# Altium PCB projet_pcb_nucleo_g431.PCBDOC
Units mil, origin at the board's own origin, x right, y up, seen from the top; angles counter-clockwise.
Board outline 4255 x 4455 mil, 2 copper layers (TopLayer, BottomLayer); 23 components, 33 nets, 143 pads, 22 vias.
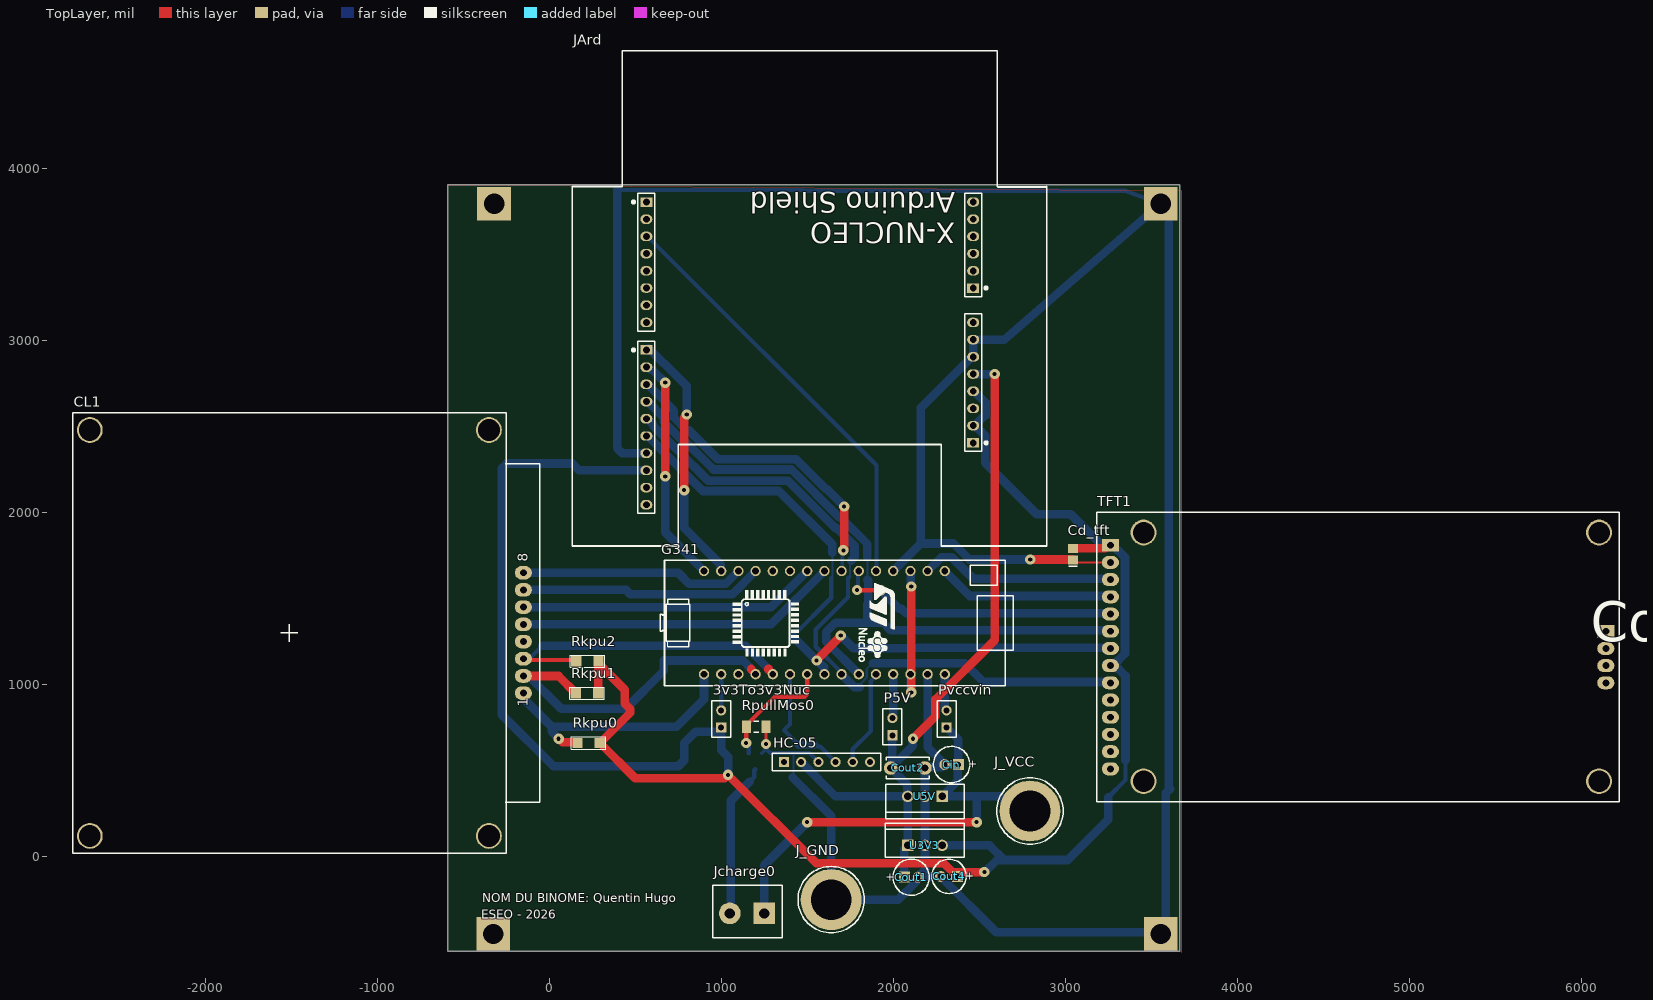
[diagram p0: TopLayer view]
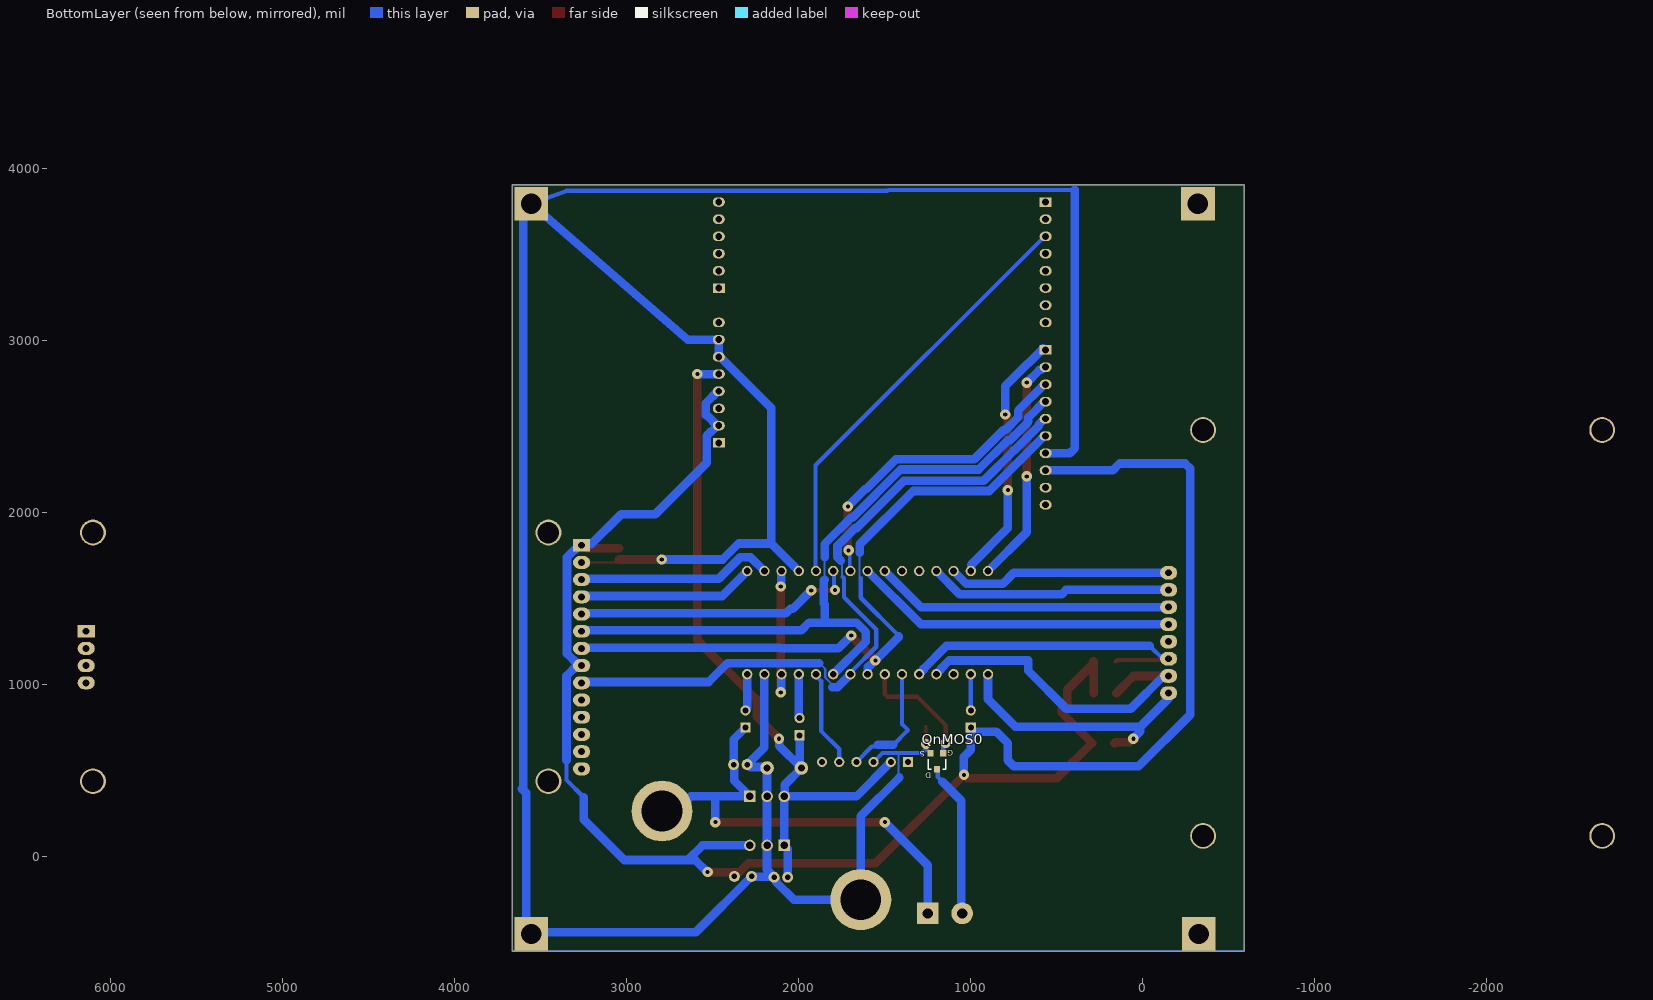
[diagram p1: BottomLayer view, seen from below]

## Layer stack, top to bottom
TopSolder: solder mask 0.4, Solder Resist, Dk 3.5
TopLayer: signal copper 1.4
Dielectric1: core 12.6, FR-4, Dk 4.8
BottomLayer: signal copper 1.4
BottomSolder: solder mask 0.4, Solder Resist, Dk 3.5

## Board outline
-590,-550 -590,3905 3665,3905 3665,-550

## Design rules (kind name [scope] priority, off if disabled: settings)
Clearance PowerPlaneClearance [InNamedPolygon('Bot-GND') Or  InNamedPolygon('Top-GND')] p1: gap=40 ignorepadtopadclearanceinfootprint=FALSE except(0: Arc-Hole Track-Hole SMDPad-Hole THPad-Hole Via-Hole Fill-Hole Poly-Hole Region-Hole Text-Hole)
Clearance [All] p2: gap=10 ignorepadtopadclearanceinfootprint=TRUE
FabricationTestPointUsage TestPointUsage [All] p1: valid=0 allowmultiple=FALSE
FabricationTestpoint Testpoint [All] p1: side=3 testpointundercomponent=TRUE minsize=40 maxsize=100 preferedsize=60 minholesize=20 maxholesize=40 preferedholesize=32 testpointgrid=1 allowsidetop=TRUE allowsidebottom=TRUE usegrid=TRUE gridtolerance=0.01
Height [All] p1: minheight=0 maxheight=2000 prefheight=500
HoleSize [All] p1: absolutevalues=TRUE maxlimit=300 minlimit=11.81 maxpercent=80.000 minpercent=20.000
PlaneClearance [All] p1: clearance=40
PlaneConnect [All] p1: planeconnectstyle=Relief reliefexpansion=19.68 reliefentries=4 reliefconductorwidth=40 reliefairgap=19.68
PolygonConnect [All] p1: connectstyle=Relief reliefconductorwidth=40 reliefentries=4 polygonreliefangle="90 Angle" airgapwidth=10
RoomDefinition projet_pcb_nucleo_g431 [InComponentClass('projet_pcb_nucleo_g431')] p1: confinementstyle=ConfineIn formatcopy=TRUE lockcomponents=FALSE outline 5090,95 6430,95 6430,570 5090,570
RoutingVias [All] p1: holewidth=23.62 width=60 viastyle="Through Hole" minholewidth=23.62 minwidth=60 maxholewidth=23.62 maxwidth=60
SilkToSolderMaskClearance SilkscreenOverComponentPads [IsPad] p1: minsilkscreentomaskgap=10 clearancetoexposedcopper=TRUE
SolderMaskExpansion [All] p1: expansion=2
Width [All] p1: maxlimit=1000 minlimit=12 preferedwidth=25
23 further rules are at their usual default settings.

## Components (designator, comment, footprint, x,y, rotation, side; value= is the part's Value field where it differs from the comment)
3v3To3v3Nuc "JUMPER2" BARRETTE_2_M_D 1000,750 r90 top
Cd_tft "10uF" C0805_N 3045,1757.86 r90 top value=10µF
Cin "CONDENSATEUR_POL_ELECTROLY_RAD_2.0/5.08" CONDENSATEUR_POLARISE_ELECTROLYTIQUE_RADIAL_2.0/5.08 2339.5,535 r180 top value=10µF/>25V
CL1 "CLAVIER_16_TOUCHES" CLAVIER_16_TOUCHES -150,950 r90 top
Cout1 "CONDENSATEUR_POL_ELECTROLY_RAD_2.0/5.08" CONDENSATEUR_POLARISE_ELECTROLYTIQUE_RADIAL_2.0/5.08 2104.5,-120 r0 top value=1µF/>10V
Cout2 "CONDENSATEUR_CER_RAD_5.08" CONDENSATEUR_CERAMIQUE_RADIAL_5.08 2184.5,515 r180 top value=100nF
Cout4 "CONDENSATEUR_POL_ELECTROLY_RAD_2.54/5.08" CONDENSATEUR_POLARISE_ELECTROLYTIQUE_RADIAL_2.54/5.08 2374.5,-115 r180 top value=4.7µF/63V
G341 "STM32G431KB" NUCLEO-G431KB 1600,1360 r270 top
HC-05 "BARRETTE_6 CONTACTS_1 RANGEE_FEMELLE_DROITE" BARRETTE_6_F_D 1365,550 r0 top
J_GND "DOUILLE BANANE 4mm" DOUILLE_BANANE_4mm 1639.5,-250 r0 top
J_VCC "DOUILLE BANANE 4mm" DOUILLE_BANANE_4mm 2795,265 r0 top
JArd "X-NUCLEO-ArduinoShield" X-NUCLEO-ARDUINO_SHIELD 1515,2925 r180 top
Jcharge0 "BORNIER2 DROIT A VIS" BORNIER2_A_VIS 1250,-330 r180 top
P5V "JUMPER2" BARRETTE_2_M_D 1995,705 r90 top
Pvccvin "JUMPER2" BARRETTE_2_M_D 2310,750 r90 top
QnMOS0 "TRANSISTOR_MOSFET-N_SOT23_GSD" TRANSISTOR_MOSFET-N_SOT23_GSD 1197.6,553.74 r0 bottom
Rkpu0 "RESISTANCE_CMS_1206" RESISTANCE_CMS_1206 165,660 r0 top value=10k
Rkpu1 "RESISTANCE_CMS_1206" RESISTANCE_CMS_1206 155,950 r0 top value=10k
Rkpu2 "RESISTANCE_CMS_1206" RESISTANCE_CMS_1206 157.01,1135 r0 top value=10k
RpullMos0 "RESISTANCE_AXIALE_1/4W" R1206_N 1204.02,755.04 r180 top value=10K
TFT1 "ECRAN_TFT_2.4_TACTILE" ECRAN_TFT_2.4_TACTILE 3182.5,320 r0 top
U3V3 "REGULATEUR_TO220_78XX" REGULATEUR_TO220_78XX 2184.5,65 r0 top
U5V "REGULATEUR_TO220_78XX" REGULATEUR_TO220_78XX 2184.5,350 r180 top

## Footprints (in the part's own frame and the unit in brackets; to place one, negate y for a bottom-side part, rotate by r counter-clockwise, add the part's x,y. Pads: shape width x height; smd on the part's side, far side on the other; paste and mask are expansions set on the pad)
BARRETTE_2_M_D [mm] "BARRETTE 2 CONTACTS ; 1 RANGEE ; DROITE ; MALE ; ESPACEMENT BROCHES = 2.54 mm"
  rect 1.5x1.5 hole 0.9: 1(0,0)
  round 1.5 hole 0.9: 2(2.54,0)
  silkscreen extent -1.4,-1.4 3.94,1.4, body extent -1.3,-1.2 3.78,1.3, height 8.55
BARRETTE_6_F_D [mm] "BARRETTE 6 CONTACTS ; 1 RANGEE ; DROITE ; FEMELLE ; ESPACEMENT BROCHES = 2.54 mm"
  rect 1.5x1.5 hole 0.9: 1(0,0)
  round 1.5 hole 0.9: 2(2.54,0) 3(5.08,0) 4(7.62,0) 5(10.16,0) 6(12.7,0)
  silkscreen extent -1.7,-1.27 14.3,1.27, body extent -1.57,-1.2 14.17,1.21, height 8.5
BORNIER2_A_VIS [mm] "BORNIER 2 PLOTS A VIS ; VERTICAL ; ESPACEMENT BROCHES = 5.08mm"
  rect 3.2x3.2 hole 1.5: 1(0,0)
  round 3.2 hole 1.5: 2(5.08,0)
  silkscreen extent -2.69,-4.15 7.62,3.63, body extent -2.5,-4 7.5,3.5, height 10
C0805_N [mm] "Chip Capacitor, Body 2.0x1.3mm, IPC Medium Density"
  rect 1.3x1.5 smd: 1(-0.85,0) 2(0.85,0)
  silkscreen extent -1.8,-0.65 -1.8,0.65, body extent -0.99,-0.63 1.01,0.63, height 0.8
CLAVIER_16_TOUCHES [mil] "CLAVIER 65mm x 69mm"
  oval 79x100 hole 40: 1(0,0) 2(100,0) 3(200,0) 4(300,0) 5(400,0) 6(500,0) 7(600,0) 8(700,0)
  round 150 hole 126: FIX1(-830,2520) FIX2(1530,2520) FIX3(1530,200) FIX4(-830,200)
  silkscreen extent -930,-95 1630,2620
CONDENSATEUR_CERAMIQUE_RADIAL_5.08 [mil] "CONDENSATEUR TRAVERSANT CERAMIQUE RADIAL ; DIMENSIONS : 3.17mm x 5.08mm"
  round 79 hole 40: 1(0,0) 2(200,0)
  silkscreen extent -25,-62 225,63, body extent -11,-43 209,42, height 148
CONDENSATEUR_POLARISE_ELECTROLYTIQUE_RADIAL_2.0/5.08 [mil] "CONDENSATEUR POLARISE ELECTROLYTIQUE RADIAL ; DIAMETRE : 5.08mm ; ESPACEMENT BROCHES : 2mm"
  rect 64x64 / inner round 64 / far side round 64 hole 32: 1(-39.37,0)
  round 64 hole 32: 2(39.37,0)
  silkscreen extent -106,-106 105,106, body extent -98,-98 98,98, height 433
CONDENSATEUR_POLARISE_ELECTROLYTIQUE_RADIAL_2.54/5.08 [mil] "CONDENSATEUR_POLARISE_ELECTROLYTIQUE_RADIAL ; DIAMETRE : 5.08mm ; ESPACEMENT BROCHES : 2.54mm"
  rect 64x64 / inner round 64 / far side round 64 hole 32: 1(0,0)
  round 64 hole 32: 2(100,0)
  silkscreen extent -50,-100 150,100, body extent -50,-101 149,98, height 446
DOUILLE_BANANE_4mm [mm] "DOUILLE BANANE ; DIAMETRE PASSAGE CONTACT = 4 mm ; DIAMETRE PERCAGE = 6 mm"
  round 9 hole 6: 1(0,0)
  silkscreen extent -4.89,-4.89 4.89,4.89, body extent -5.5,-5.6 5.63,5.53, height 4.79
ECRAN_TFT_2.4_TACTILE [mil]
  round 150 hole 125: 0(272.44,118.11) 0(272.44,1563.78) 0(2920.47,118.11) 0(2920.47,1563.78)
  rect 100x75 hole 40: 1(80,1490) 18(2959.84,990)
  oval 100x75 hole 40: 2(80,1390) 3(80,1290) 4(80,1190) 5(80,1090) 6(80,990) 7(80,890) 8(80,790) 9(80,690) 10(80,590) 11(80,490) 12(80,390) 13(80,290) 14(80,190) 15(2959.84,690) 16(2959.84,790) 17(2959.84,890)
  silkscreen extent 0,-1 3039,1682, body extent 0,-2 3039,1680, height 337
NUCLEO-G431KB [mil] "STM32 Nucleo-32 development board with STM32G431KB MCU"
  round 60 hole 39.37: 1(-300,700) 2(-300,600) 3(-300,500) 4(-300,400) 5(-300,300) 6(-300,200) 7(-300,100) 8(-300,0) 9(-300,-100) 10(-300,-200) 11(-300,-300) 12(-300,-400) 13(-300,-500) 14(-300,-600) 15(-300,-700) 16(300,700) 17(300,600) 18(300,500) 19(300,400) 20(300,300) 21(300,200) 22(300,100) 23(300,0) 24(300,-100) 25(300,-200) 26(300,-300) 27(300,-400) 28(300,-500) 29(300,-600) 30(300,-700)
  silkscreen extent -362,-955 366,1096, body extent -362,-953 368,1096, height 842
R1206_N [mm] "Chip Resistor, Body 3.2x1.6mm, IPC Medium Density"
  rect 1.3x1.8 smd: 1(-1.45,0) 2(1.45,0)
  silkscreen extent -0.4,-0.8 0.4,0.8, body extent -1.68,-0.87 1.68,0.87, height 0.71
REGULATEUR_TO220_78XX [mm] "BOITIER TO220 ; DIMENSIONS : 11.2mm x 4.7mm ; ESPACEMENT BROCHES : 2.54 mm"
  rect 1.7x1.7 hole 1.1: 1(-2.54,0)
  round 1.7 hole 1.1: 2(0,0) 3(2.54,0)
  silkscreen extent -5.83,-1.77 5.8,3.29, body extent -5.61,-1.59 5.61,3.1, height 19.33
RESISTANCE_CMS_1206 [mil] "RESISTANCE CMS 1206 ; DIMENSIONS : 3.2mm x 1.6mm"
  rect 60x60 smd: 1(0,0) 2(130,0)
  silkscreen extent -35,-35 165,35, body extent 0,-31 126,31, height 39
TRANSISTOR_MOSFET-N_SOT23_GSD [mm] "SOT23 ; DIMENSIONS : 3.0mm x 2.5 mm"
  rect 0.9x0.95 smd: 1(-0.95,-1.175) 2(0.95,-1.175) 3(0,1.175)
  silkscreen extent -1.3,-0.3 1.3,1.18, body extent -1.5,-1.57 1.5,1.57, height 1.1
X-NUCLEO-ARDUINO_SHIELD [mil]
  rect 70x55 hole 40: CN5-1(950,-20) CN6-1(-950,520) CN8-1(-950,-380) CN9-1(950,-880)
  oval 70x55 hole 40: CN5-2(950,80) CN5-3(950,180) CN5-4(950,280) CN5-5(950,380) CN5-6(950,480) CN5-7(950,580) CN5-8(950,680) CN5-9(950,780) CN5-10(950,880) CN6-2(-950,420) CN6-3(-950,320) CN6-4(-950,220) CN6-5(-950,120) CN6-6(-950,20) CN6-7(-950,-80) CN6-8(-950,-180) CN8-2(-950,-480) CN8-3(-950,-580) CN8-4(-950,-680) CN8-5(-950,-780) CN8-6(-950,-880) CN9-2(950,-780) CN9-3(950,-680) CN9-4(950,-580) CN9-5(950,-480) CN9-6(950,-380) CN9-7(950,-280) CN9-8(950,-180)
  silkscreen extent -1378,-1760 1380,1120

## Part data
3v3To3v3Nuc P5V Pvccvin: "BARRETTE 2 CONTACTS 1 RANGEE MALE DROITE", Type=JUMPER2
Cd_tft: library part CONDENSATEUR_CMS_CER_0805, "CONDENSATEUR CMS CERAMIQUE 0805", Type=Cd_tft
Cin Cout1: "CONDENSATEUR POLARISE ELECTROLYTIQUE RADIAL 2.0/5.08", Type=POL_RAD_2.0/5.08
CL1: "CLAVIER 16 TOUCHES", Type=CLAVIER16
Cout2: "CONDENSATEUR TRAVERSANT CERAMIQUE RADIAL 5.08mm", Type=RADIAL_5.08
Cout4: "CONDENSATEUR POLARISE ELECTROLYTIQUE RADIAL 2.54/5.08", Type=POL_RAD_2.54/5.08
G341: library part G431_Nucleo, "The STM32 Nucleo-32 board provides an affordable and flexible way for users to try out new concepts and build prototypes by choosing from the various combinations of performance and power consumption features, provided by the STM32 microcontroller."
HC-05: "BARRETTE 6 CONTACTS 1 RANGEE FEMELLE DROITE", Type=F_D_6
J_GND J_VCC: library part DOUILLE_BANANE_4mm, "DOUILLE BANANE 4 mm", Type=BANANE_4mm
Jcharge0: library part "BORNIER2_DROIT_A VIS", "BORNIER 2 PLOTS DROIT A VIS 5.08mm", Type=BORNIER2_D
QnMOS0: "TRANSISTOR MOSFET CANAL N BOITIER SOT23_GSD", Package=SOT23, Type=IRFML8244TRPBF
Rkpu0 Rkpu1 Rkpu2: "RESISTANCE CMS 1206", Type=CMS_1206
RpullMos0: "RESISTANCE TRAVERSANTE AXIALE 1/4W", Type=1/4W
U3V3 U5V: "REGULATEUR DE TENSION POSITIVE 78XX BOITIER TO220", Package=(TO220)
  U3V3: Type=LF33CV
  U5V: Type=7805

## Free pads (board coordinates)
  rect 196.85x196.85 hole 118.11: 1(-320,3795) 2(-325,-450) 3(3555,-450) 4(3555,3795)

## Via types
v1: diameter 60, hole 23.62, TopLayer to BottomLayer, 22 vias

## Nets (pads, with @x,y where several pads share a name; then routed paths per layer and width w, separated by ;. In a path a pad name is that pad's centre, name@x,y a point inside that pad or via, vN(x,y) a via of type N, cw(c..) or ccw(c..) an arc to the next point about the centre after c; other vN are vias at no path point)
+3V3_NUC: 3v3To3v3Nuc.2 G341.29 | length 210
  BottomLayer w25: 3v3To3v3Nuc.2 G341.29
+5V: Cout1.1 Cout2.2 HC-05.2 JArd.CN6-5 P5V.1 U3V3.1 U5V.3 | length 4246.9
  TopLayer w50: v1(2115,685) 2245.47,815.47 2245.47,913.55 2590,1258.08 v1(2590,2805)
  BottomLayer w50: HC-05.2 1665,350 U5V.3 ; P5V.1 1995,533.35 1984.5,522.85 Cout2.2 ; Cout1.1 2065.13,45.63 U3V3.1 U5V.3 ; v1(2115,685) 2113.09,683.09 2113.09,643.59 Cout2.2 ; JArd.CN6-5 v1(2590,2805) ; Cout2.2 2081.26,418.24 2081.26,353.24 U5V.3
+5V_NUC: G341.19 P5V.2 | length 257.1
  BottomLayer w50: P5V.2 1995,807.45 2000,812.45 G341.19
GND: Cd_tft.1 Cin.2 Cout1.2 Cout2.1 Cout4.2 G341.4 G341.17 HC-05.3 J_GND.1 JArd.CN5-7 JArd.CN6-6 JArd.CN6-7 pad.3 pad.4 QnMOS0.2 RpullMos0.1 TFT1.2 U3V3.2 U5V.2 | length 18044.6
  TopLayer w12: TFT1.2@3243.24,1710 3059.39,1710 Cd_tft.1@3046.17,1723.22 ; Cd_tft.1@3046.17,1723.22 3043.83,1723.22 Cd_tft.1 Cd_tft.1@3046.17,1723.22
  TopLayer w20: v1(1260,655) 1260.55,655.55 1260.55,754.49 RpullMos0.1
  TopLayer w50: v1(2796.49,1726.74) 3042.65,1726.74 Cd_tft.1 ; TFT1.2@3243.24,1710 TFT1.2
  BottomLayer w12: 1415,460 1419.47,464.47 1419.47,599.47 1420,600 ; TFT1.2@3252.79,1719.71 TFT1.2
  BottomLayer w20: QnMOS0.2 1260,625 v1(1260,655)
  BottomLayer w25: 395,3875 1480,3875 1485,3870 3350,3870 pad.4 ; v1@1261.1,626.1 1285.18,602.03 1417.97,602.03 1420,600 1422.03,602.03 1512.97,602.03 HC-05.3
  BottomLayer w50: 395,3875 395,2374.29 424.29,2345 JArd.CN5-7 ; 1415,460 1639.5,235.5 J_GND.1 2029.88,-250 2132.13,-147.75 2132.13,-135.53 2143.87,-123.79 Cout1.2 ; G341.4 2160,1820 ; G341.17 2200,635.13 Cin.2 2296.34,535 2281.89,520.55 2190.05,520.55 Cout2.1 U5V.2 U3V3.2 2184.5,-75.58 2143.87,-116.21 Cout1.2 ; v1@2800,1723.22 v1(2796.49,1726.74) 2443.26,1726.74 2350,1820 2160,1820 ; pad.3@3555,-440 2599.5,-440 Cout4.2 2272,-117.5 2146.37,-117.5 Cout1.2 ; pad.3@3585,-375 3585,365.11 ; 3585.98,370.98 3610,395 ; 3602.44,397.55 3602.44,3697.56 3554.52,3793.57 pad.4 2645,3005 JArd.CN6-7 JArd.CN6-6 2457.5,2905 2160,2607.5 2160,1820
HC-05_Key: HC-05.1
HC-05_RX: G341.20 HC-05.5 | length 565.9
  TopLayer w25: G341.20@1900,1050.53 G341.20
  BottomLayer w25: HC-05.5 1765,625 1870,730 1870,1020.53 G341.20@1900,1050.53
HC-05_State: HC-05.6
HC-05_TX: G341.25 HC-05.4 | length 716.1
  BottomLayer w25: G341.25 1400,770 1365,735 1450,650 ; 1540,650 1550.49,639.51 1575.49,639.51 HC-05.4
  BottomLayer w50: 1450,650 1540,650
NetJcharge0_2: Jcharge0.2 QnMOS0.3 | length 898.6
  BottomLayer w25: 1165,435 1192.38,462.38 1192.38,502.26 QnMOS0.3
  BottomLayer w50: Jcharge0.2 1055,-325 1055,325 1165,435
NRST: G341.3 G341.18 | length 814.1
  TopLayer w50: v1(2105,955) v1(2105,1570)
  BottomLayer w50: G341.18 2101.91,1058.09 2101.91,960.79 2105,957.71 v1(2105,955) ; G341.3 2101.91,1658.09 2101.91,1575.79 2105,1572.71 v1(2105,1570)
PA0: CL1.2 G341.27 Rkpu1.1 | length 1963.4
  TopLayer w50: CL1.2 55,1050 Rkpu1.1 ; 1175,1087.71 1175,1091.07 ; G341.27 G341.27@1200,1062.71
  BottomLayer w25: CL1.2 CL1.2@-120,1050
  BottomLayer w50: CL1.2@-120,1050 70,860 445.71,860 665,1079.29 665,1140 1126.07,1140 1175,1091.07 ; 1175,1087.71 G341.27@1200,1062.71
PA1: CL1.3 G341.26 Rkpu2.1 | length 1861.8
  TopLayer w25: CL1.3 -142.5,1142.5 149.51,1142.5 Rkpu2.1
  TopLayer w50: 1275,1087.71 1275,1091.07 ; G341.26 G341.26@1300,1062.71
  BottomLayer w25: CL1.3@-142.5,1142.5 -122.5,1142.5 -40,1225
  BottomLayer w50: -40,1225 1141.07,1225 1275,1091.07 ; 1275,1087.71 G341.26@1300,1062.71
PA4: G341.24 QnMOS0.1 RpullMos0.2 | length 720.9
  TopLayer w25: v1(1145,660) 1145.96,660.96 RpullMos0.2@1145.96,756 ; RpullMos0.2@1145,756.97 RpullMos0.2@1145.96,756 ; G341.24 1500,944.64 1485.36,930 1312.05,930 1146.93,764.88 RpullMos0.2 RpullMos0.2@1145.96,756
  BottomLayer w25: v1@1146.93,661.93 v1(1145,660) 1160.2,644.8 QnMOS0.1
PA5: G341.23 JArd.CN5-6 TFT1.7 | length 4029.9
  TopLayer w50: v1(1555,1140) 1555,1142.5 1695,1282.5 v1(1695,1285) ; G341.23@1598.09,1061.91 G341.23
  BottomLayer w12: 1640,1620 1646,1626 1646,1766 1645,1767
  BottomLayer w25: 1420,1280 1420,1285 1640,1505 1640,1620
  BottomLayer w50: JArd.CN5-6 572.5,2445 892.5,2125 1335,2125 1645,1815 1645,1767 ; 1420,1280 1420,1275 v1(1555,1140) 1557.71,1140 1593.5,1104.21 1598.09,1104.21 G341.23@1598.09,1061.91 ; v1(1695,1285) 1770,1210 2105,1210 2110,1215 TFT1.7@3220,1215
PA6: G341.22 JArd.CN5-5 TFT1.9 | length 4115.2
  BottomLayer w12: 1745,1625 1750,1630 1750,1715 1755,1720 ; 1805,985 1805,999.95 1846,1040.95 1846,1091 1880,1125
  BottomLayer w25: G341.22 1700,1069.47 1550,1219.47 1550,1320 1737.5,1507.5 1737.5,1617.5 1745,1625
  BottomLayer w50: JArd.CN5-5 571.15,2545 605,2511.15 605,2503.37 747.6,2360.77 749.23,2360.77 925,2185 1388.22,2185 1663.22,1910 1671.92,1910 1775,1806.92 1775,1740 1755,1720 ; G341.22 1775,985 1805,985 ; 1880,1125 2415,1125 2525,1015 TFT1.9@3220,1015
PA7: G341.21 JArd.CN5-4 TFT1.6 | length 4078.3
  BottomLayer w12: 1850,1610 1850,1740
  BottomLayer w50: JArd.CN5-4 572.5,2645 665,2552.5 665,2528.22 772.45,2420.77 784.23,2420.77 955,2250 1408.08,2250 1688.08,1970 1696.78,1970 1850,1816.78 1850,1740 ; G341.21 1610,1250 1610,1305 1665,1360 1850,1360 ; 1850,1610 1855,1605 1855,1470.96 1850,1465.96 1850,1360 ; TFT1.6@3220,1315 1985.15,1315 1940.15,1360 1850,1360
PA8: CL1.7 G341.12 | length 1416.3
  BottomLayer w50: CL1.7 446.6,1550 471.6,1525 1065,1525 G341.12
PA9: G341.1 TFT1.4 | length 980.1
  BottomLayer w50: G341.1 2445,1515 TFT1.4@3220,1515
PA10: G341.2 TFT1.3 | length 1104.9
  BottomLayer w50: G341.2 2280,1740 2340,1740 2465,1615 TFT1.3@3220,1615
PA11: CL1.8 G341.13 | length 1308
  BottomLayer w50: CL1.8 750,1650 815,1585 1025,1585 G341.13
PA12: G341.5 JArd.CN9-3 | length 2506.2
  TopLayer w25: JArd.CN9-3 JArd.CN9-3@572.5,3605
  BottomLayer w25: JArd.CN9-3@572.5,3605 1902.71,2274.79 G341.5@1902.71,1660
  BottomLayer w50: G341.5 G341.5@1902.71,1660
PA15: CL1.5 G341.8 | length 1878.4
  BottomLayer w50: CL1.5 1290,1350 G341.8
PB0: G341.6 TFT1.5 | length 1600.1
  TopLayer w25: v1(1790,1550) 1790.98,1549.02 1926.48,1549.02 v1(1927.46,1548.04)
  BottomLayer w25: v1(1790,1550) 1795,1555 1795,1655 G341.6
  BottomLayer w50: v1(1927.46,1548.04) 2035.5,1440 2050,1440 2075,1415 TFT1.5@3220,1415
PB3/(PB8): CL1.1 G341.30 Rkpu0.1 | length 1584.9
  TopLayer w25: CL1.1 CL1.1@-139.5,950
  TopLayer w50: CL1.1 CL1.1@-144.45,944.45 ; v1(55,685) 57.71,685 77.71,665 160,665 Rkpu0.1
  BottomLayer w50: CL1.1 -150,920 15,755 ; v1(55,685) 55,687.71 15,727.71 15,755 ; G341.30 900,915 740,755 15,755
PB4: G341.15 JArd.CN5-2 | length 1335.5
  TopLayer w50: v1(675,2210) v1(675,2755)
  BottomLayer w50: JArd.CN5-2 573.85,2845 589.61,2829.25 600.75,2829.25 v1(675,2755) ; v1(675,2210) 675,1885 G341.15
PB5: G341.14 JArd.CN5-1 | length 1483.1
  TopLayer w50: JArd.CN5-1 JArd.CN5-1@572.5,2945 ; v1(785,2130) 785,2552.29 800,2567.29 v1(800,2570)
  BottomLayer w50: JArd.CN5-1@578.12,2954.38 660.29,2872.21 ; 666.25,2868.75 800,2735 v1(800,2570) ; v1(785,2130) 785,1910 998.09,1696.91 998.09,1661.91 G341.14
PB6: CL1.6 G341.9 | length 1737
  BottomLayer w50: CL1.6 1290,1450 G341.9
PB7: G341.7 JArd.CN5-3 | length 1848.4
  TopLayer w50: v1(1710,1780) 1710,1782.71 1715,1787.71 v1(1715,2035)
  BottomLayer w20: G341.7 1705,1665 1705,1775 v1(1710,1780)
  BottomLayer w50: JArd.CN5-3 572.5,2745 725,2592.5 725,2553.08 797.3,2480.77 809.08,2480.77 979.85,2310 1434.85,2310 1609.93,2134.93 1615.07,2134.93 v1(1715,2035)
PF0: G341.10
PF1: G341.11
TFT-LED: 3v3To3v3Nuc.1 Cd_tft.2 Cout4.1 JArd.CN5-8 JArd.CN6-2 JArd.CN6-4 Rkpu0.2 Rkpu1.2 Rkpu2.2 TFT1.1 TFT1.8 U3V3.3 | length 12178
  TopLayer w50: Rkpu1.2 286,951 Rkpu2.2@286,1124 ; Rkpu2.2 286,1134 Rkpu2.2@286,1124 ; v1(2530,-90) 2344.25,-90 2292.09,-37.83 1552.83,-37.83 v1(1040,475) 1020,455 500,455 Rkpu0.2 470,835 470,860 440,890 440,970 Rkpu2.2@286,1124 ; Cd_tft.2 3231.32,1791.32 3250,1810 TFT1.1
  BottomLayer w12: 3v3To3v3Nuc.1@976.47,726.47 3v3To3v3Nuc.1
  BottomLayer w25: 3250,345 3350,445 3350,560 ; TFT1.1@3250,1810 TFT1.1
  BottomLayer w50: JArd.CN5-8 175.22,2245 135.22,2285 -245.71,2285 -275,2255.71 -275,825 25,525 750,525 785,560 785,660 851.47,726.47 3v3To3v3Nuc.1@976.47,726.47 ; 3v3To3v3Nuc.1 1000,620 1040,580 v1(1040,475) ; U3V3.3 2560,65 2645,-20 ; JArd.CN6-2 JArd.CN6-2@2473.85,2505 ; JArd.CN6-4 2471.15,2705 2540,2636.15 2540,2565 2533.85,2565 JArd.CN6-2@2473.85,2505 ; v1@2530,-87.29 v1(2530,-90) 2532.71,-90 2602.71,-20 2645,-20 ; 3207.5,1815 3032.5,1990 2834.2,1990 2535,2289.2 2535,2447 2513.31,2468.69 2510.16,2468.69 JArd.CN6-2@2473.85,2505 ; TFT1.1@3220,1815 TFT1.1@3232.5,1815 ; TFT1.8@3235.03,1115 TFT1.8@3282.53,1115 ; 3250,345 3250,215 3015,-20 2645,-20 ; TFT1.8 3277.53,1110 TFT1.8@3282.53,1115 ; TFT1.1@3275,1810 3302.5,1782.5 3305.03,1782.5 3347.5,1740.03 3347.5,1179.97 TFT1.8@3282.53,1115 ; 3350,560 3350,1050 3285,1115 TFT1.8@3282.53,1115
VCC: Cin.1 J_VCC.1 Jcharge0.1 Pvccvin.1 U5V.1 | length 2783.9
  TopLayer w50: v1(1500,200) v1(2485,200)
  BottomLayer w50: Jcharge0.1 1250,-50 v1(1500,200) ; Pvccvin.1 2378.87,681.13 Cin.1 2376.19,532.32 2376.19,441.69 U5V.1 2480,350 ; v1(2485,200) 2485,345 2480,350 ; J_VCC.1 2712.65,265 2627.65,350 2480,350
VIN: G341.16 Pvccvin.2 | length 214.1
  BottomLayer w50: G341.16 2300,862.45 2310,852.45 Pvccvin.2
pads on no net: CL1.4 CL1.FIX1 CL1.FIX2 CL1.FIX3 CL1.FIX4 G341.28 JArd.CN5-9 JArd.CN5-10 JArd.CN6-1 JArd.CN6-3 JArd.CN6-8 JArd.CN8-1 JArd.CN8-2 JArd.CN8-3 JArd.CN8-4 JArd.CN8-5 JArd.CN8-6 JArd.CN9-1 JArd.CN9-2 JArd.CN9-4 JArd.CN9-5 JArd.CN9-6 JArd.CN9-7 JArd.CN9-8 TFT1.0 TFT1.10 TFT1.11 TFT1.12 TFT1.13 TFT1.14 TFT1.15 TFT1.16 TFT1.17 TFT1.18

## Polygon pours and split planes (outlines as drawn)
GND on TopLayer "Top-GND" (solid, pour order 4): -590,3905 3675,3870 3675,-556.29 -590,-550
GND on BottomLayer "Bot-GND" (solid, pour order 5): -590,3900 3666.6,3900 3665,-545 -590,-545

## Other copper
TopLayer:

## Silkscreen, mask and mechanical layers (free items; w line width, h text height)
TopOverlay:
  text "Consignes / Conseils :" at 6055,1175 h393.7
  text "1- désactivez la fonctionnalité \"online DRC\"" at 6540,810 h393.7
  text "Tools->Preferences -> décocher 'online DRC'" at 7015,425 h393.7
  text "Tools->Reset error markers" at 7030,0 h393.7
  text "NOM DU BINOME: Quentin Hugo" at -390,-265 h50
  text "ESEO - 2026" at -395,-360 h50
  text "2- Déplacez les plans de masse en dehors de la carte" at 6535,-425 h393.7
  text "3- Si elles sont visibles / gênantes : masquez les couches mécaniques 3D" at 6510,-950 h393.7
  text "Bouton-droit sur les onglets (en bas) Mechanical1, 13 -> Hide" at 7060,-1395 h393.7
  text "4- mettre vos noms à la place de \"nom du binôme\"" at 6505,-1940 h393.7
  text "5- placement" at 6525,-2510 h393.7
  text "6- meilleur placement" at 6525,-3040 h393.7
  text "7- encore meilleur placement" at 6515,-3565 h393.7
  text "8- routage" at 6510,-4105 h393.7
  text "9- Remettez les plans de masse + Tools -> Polygon Pours -> Repour all" at 6515,-4670 h393.7
Mechanical1:
  lines w20: -590,-550 3665,-550 3665,3905 ; 4565,2520 4565,6975 8820,6975

## Text inside footprints (layer, text, board x,y; h text height)
Cin: TopOverlay "+" at 2488.32,556.65 h45 r180
CL1: TopOverlay "1" at -125,870 h56.25 r90; TopOverlay "8" at -125,1715 h56.25 r90
Cout1: TopOverlay "+" at 1955.68,-141.65 h45
Cout4: TopOverlay "+" at 2471.35,-93.35 h45 r180
JArd: TopOverlay "X-NUCLEO / Arduino Shield" at 2359.49,3862.99 h118.11 r180
QnMOS0: BottomOverlay "D" at 1229.09,486.81 h31.5 r180; BottomOverlay "S" at 1268.46,612.8 h31.5 r180; BottomOverlay "G" at 1103.11,616.73 h31.5 r180